# EAGLE board InkTime-PCB (EAGLE 9.7.0)
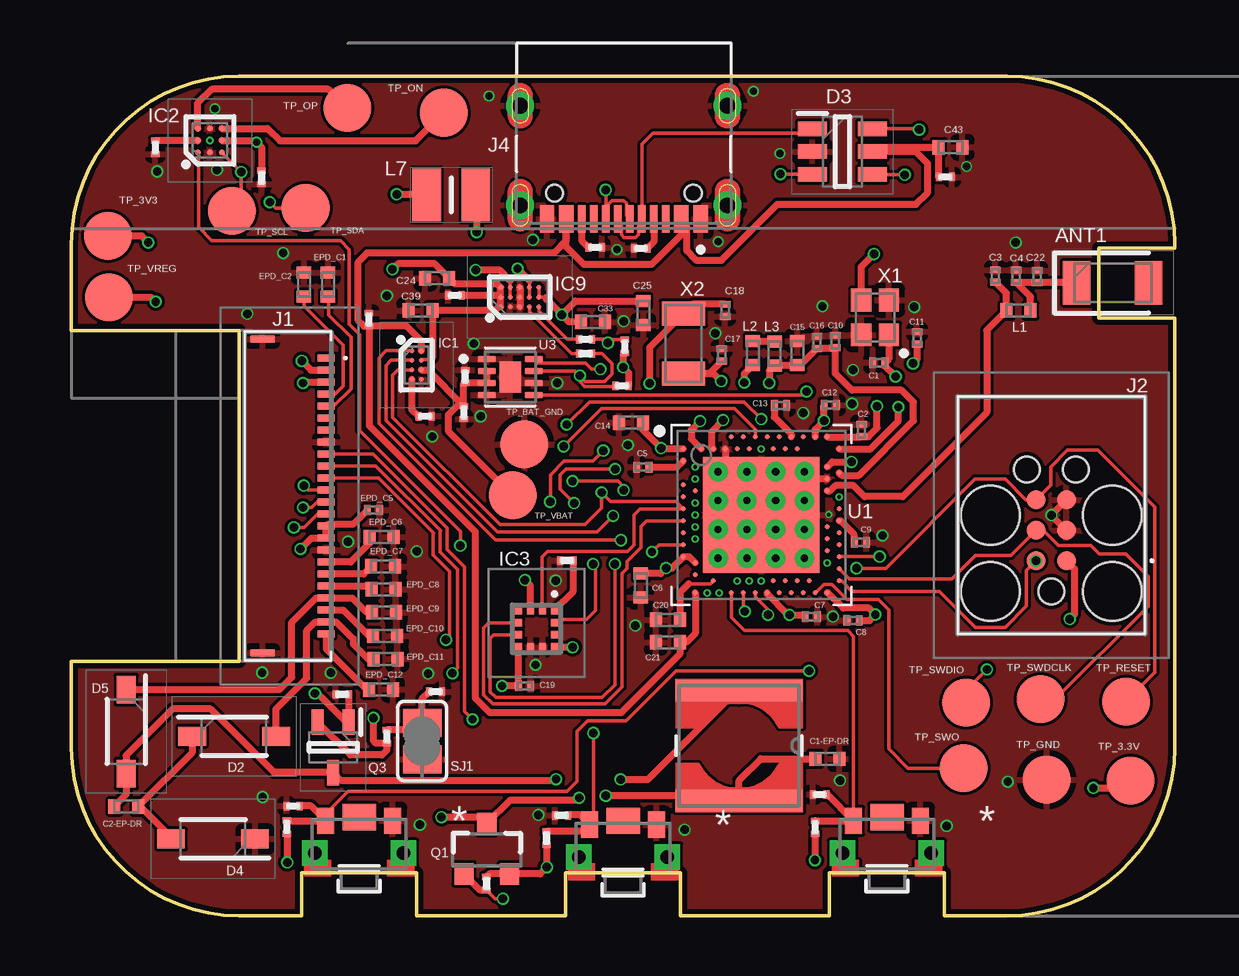
[diagram p0: board, top side]
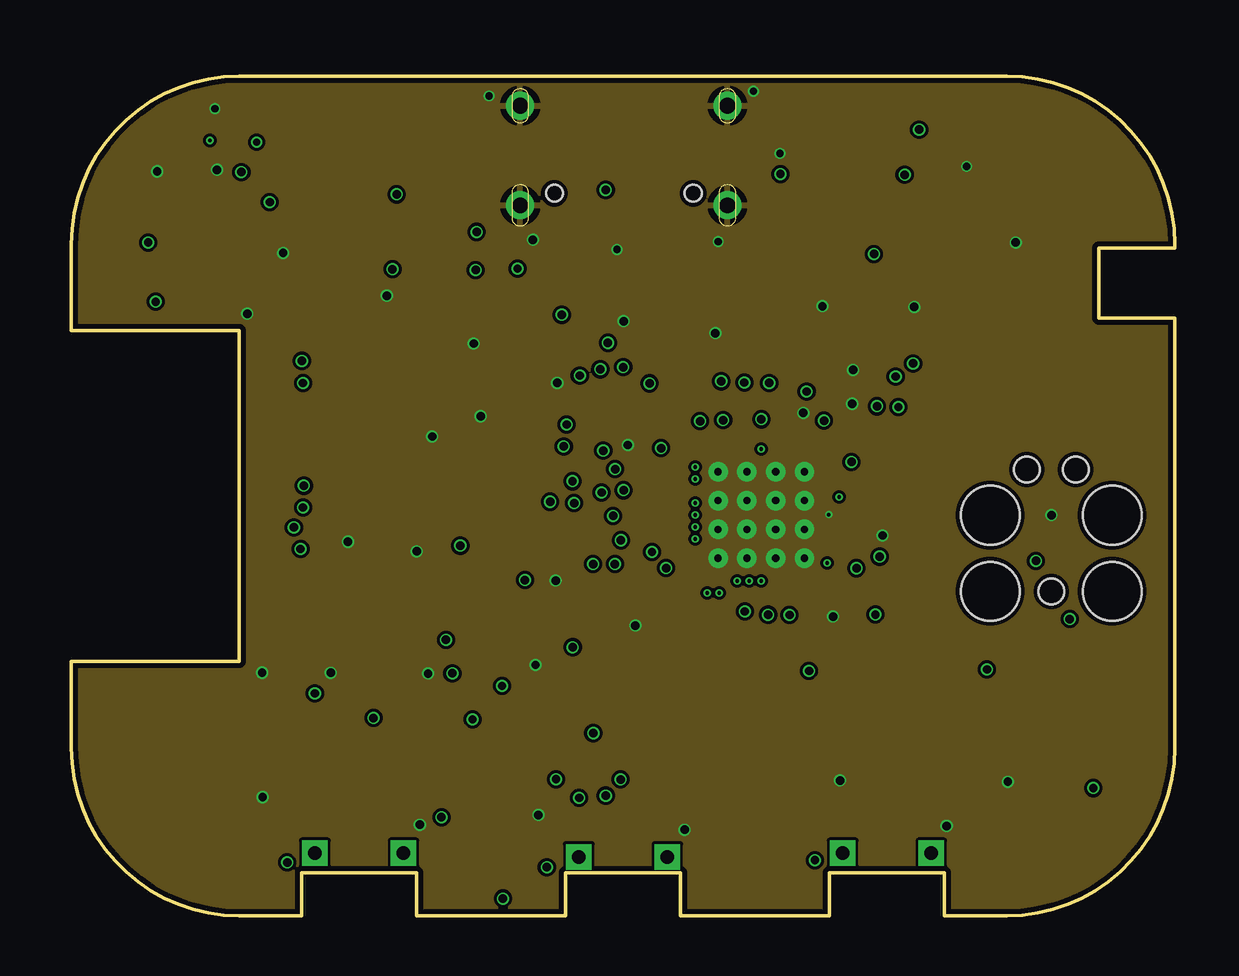
[diagram p1: board, inner layer Route2]
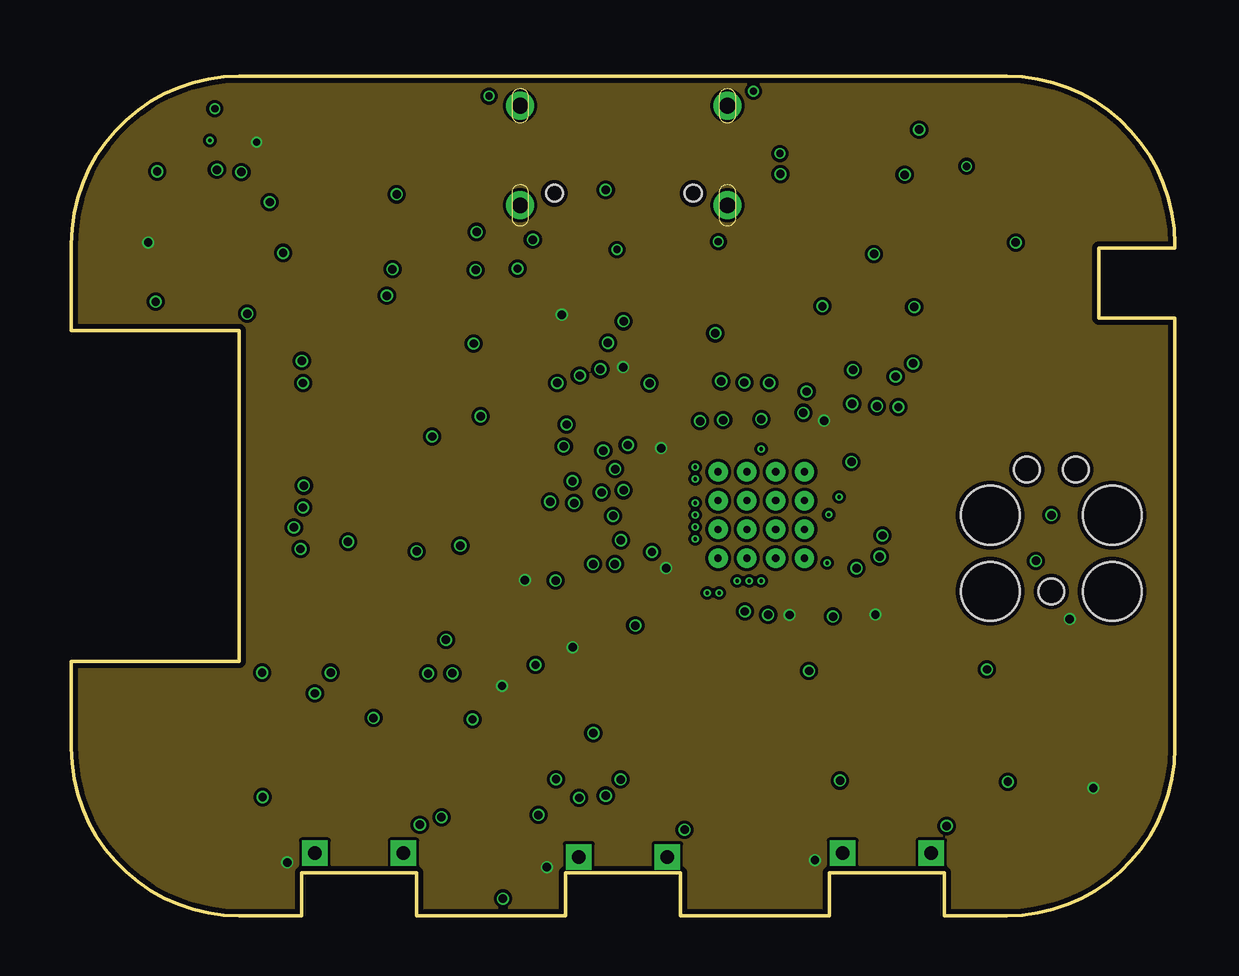
[diagram p2: board, inner layer Route15]
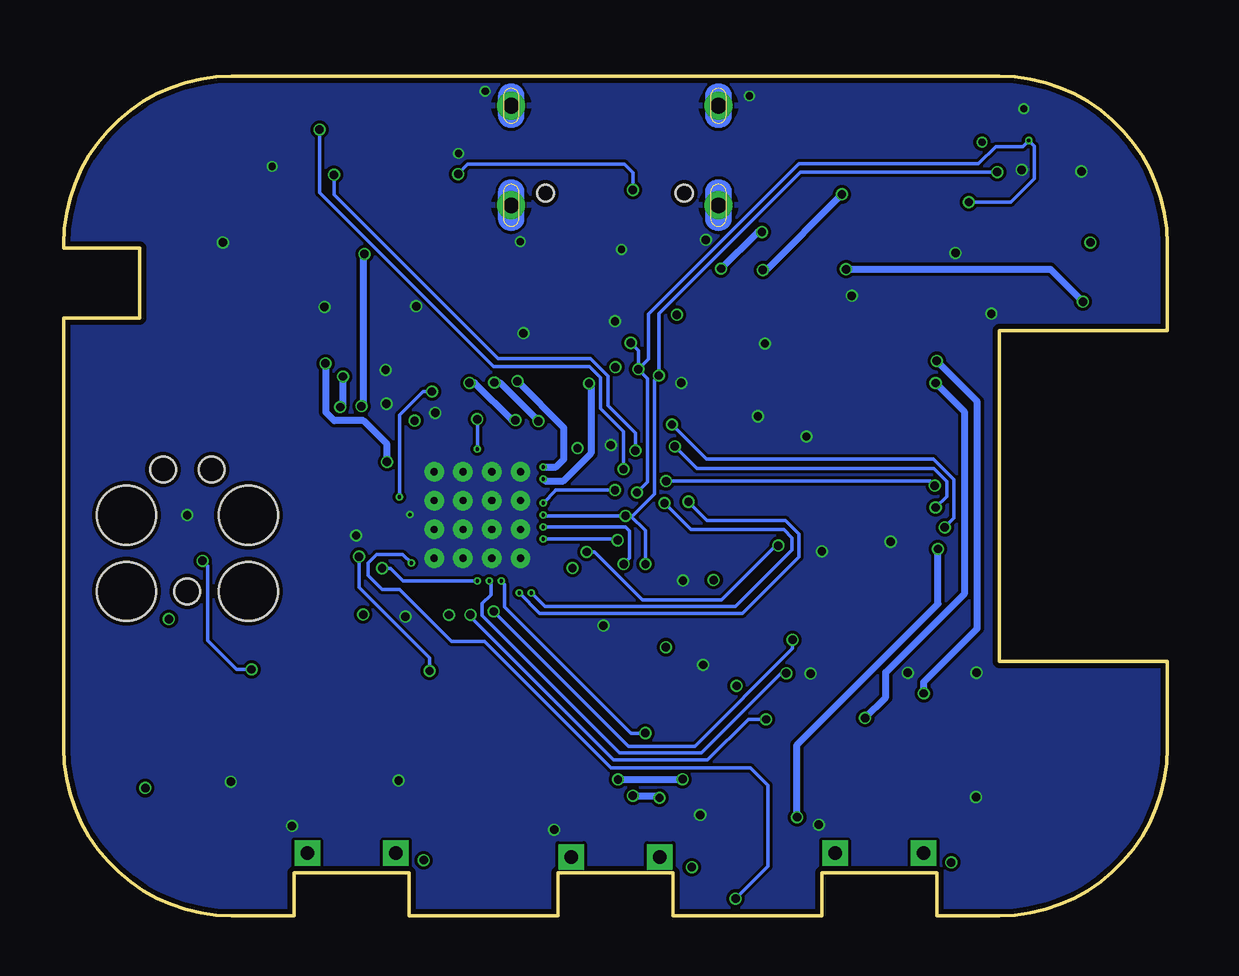
[diagram p3: board, bottom side, seen from below]

Size 46 x 35 mm. Coordinates in mm from the lower left corner, seen from the top.
Outline: 7,0 9.6,0 9.6,1.8 14.4,1.8 14.4,0 20.6,0 20.6,1.8 25.4,1.8 25.4,0 31.6,0 31.6,1.8 36.4,1.8 36.4,0 39,0 arc90 46,7 46,24.93 42.83,24.93 42.83,27.84 46,27.84 46,28 arc90 39,35 7,35 arc90 0,28 0,24.4 7,24.4 7,10.6 0,10.6 0,7 arc90 7,0
Copper layers (1+2*15+16): Top 0.035mm / dielectric 1.6mm / Route2 0.035mm / dielectric 0.15mm / Route15 0.035mm / dielectric 0.2mm / Bottom 0.035mm
Design rules "jlcpcb-2layers.dru *": minimum track width 5mil, minimum drill 0.3mm, track to track 5mil, track to pad 5mil, pad to pad 5mil, via to via 5mil, smd to smd 5mil, copper to edge 0.2mm, drill to drill 6mil, minimum pad ring 10mil, minimum via ring 3mil, stop-mask expansion 4mil, vias tented up to drill 0mil, thermal gap 10mil

## Footprints (pad centres in the part's own frame; a part is rotated, then mirrored left to right if it is on the bottom)
2450AT18B100E_ANTC3216X140N = smd 1.15 x 1.8: 1 -1.5,0; 2 1.5,0
NORDIC_NRF_3_RESC0201_L = smd 0.28 x 0.43: 1 -0.255,0; 2 0.255,0
NORDIC_NRF_3_RESC0402_L = smd 0.5 x 0.6: 1 -0.5,0; 2 0.5,0
GRM011R60J152KE01L_1_0201 = smd 0.35 x 0.25: 1 0,0.275; 2 0,-0.275
ESP32_C6_LIBRARY_5_SOD3716X135N = smd 1.15 x 0.8: 1 -1.75,0; 2 1.75,0
ESP32_C6_LIBRARY_3_SOT95P280X145-6N = smd 1.2 x 0.6: 1 -1.25,0.95; 2 -1.25,0; 3 -1.25,-0.95; 4 1.25,-0.95; 5 1.25,0; 6 1.25,0.95
BQ25180YBGR_BGA8C40P2X4_100X155X50 = smd 0.2 x 0.2: A1 -0.2,0.6; A2 0.2,0.6; B1 -0.2,0.2; B2 0.2,0.2; C1 -0.2,-0.2; C2 0.2,-0.2; D1 -0.2,-0.6; D2 0.2,-0.6
DRV2605YZFR_BGA9C50P3X3_144X144X62 = smd 0.25 x 0.25: A1 -0.5,0.5; A2 0,0.5; A3 0.5,0.5; B1 -0.5,0; B2 0,0; B3 0.5,0; C1 -0.5,-0.5; C2 0,-0.5; C3 0.5,-0.5
BMA423_BMA423 = smd 0.3 x 0.35: 1 -0.75,-0.775; 2 -0.25,-0.775; 3 0.25,-0.775; 4 0.75,-0.775; 7 0.75,0.775; 8 0.25,0.775; 9 -0.25,0.775; 10 -0.75,0.775 | smd 0.35 x 0.3: 5 0.775,-0.25; 6 0.775,0.25; 11 -0.775,0.25; 12 -0.775,-0.25
RT6160AWSC_BGA15C40P3X5_140X230X60 = smd 0.216 x 0.216: A1 -0.4,0.8; A2 0,0.8; A3 0.4,0.8; B1 -0.4,0.4; B2 0,0.4; B3 0.4,0.4; C1 -0.4,0; C2 0,0; C3 0.4,0; D1 -0.4,-0.4; D2 0,-0.4; D3 0.4,-0.4; E1 -0.4,-0.8; E2 0,-0.8; E3 0.4,-0.8
503480-2400_5034802400 = smd 0.3 x 0.7: 1 -5.75,1.525; 2 -5.25,1.525; 3 -4.75,1.525; 4 -4.25,1.525; 5 -3.75,1.525; 6 -3.25,1.525; 7 -2.75,1.525; 8 -2.25,1.525; 9 -1.75,1.525; 10 -1.25,1.525; 11 -0.75,1.525; 12 -0.25,1.525; 13 0.25,1.525; 14 0.75,1.525; 15 1.25,1.525; 16 1.75,1.525; 17 2.25,1.525; 18 2.75,1.525; 19 3.25,1.525; 20 3.75,1.525; 21 4.25,1.525; 22 4.75,1.525; 23 5.25,1.525; 24 5.75,1.525 | smd 0.3 x 1: MP1 -6.54,-1.125; MP2 6.54,-1.125
TC2030-IDC_TC2030IDC = smd 0.783 x 0.783: 1 -0.953,-0.635; 2 -0.953,0.635; 3 0.317,-0.635; 4 0.317,0.635; 5 1.588,-0.635; 6 1.588,0.635 | hole 2.451: -2.223,-2.54; -2.223,2.54; 0.952,-2.54; 0.952,2.54 | hole 1.067: -2.223,0; 2.857,-1.016; 2.857,1.016
KH-TYPE-C-16P_KINGHELM_KH-TYPE-C-16P = smd 0.6 x 1.15: A1_B12 -3.2,4.725; A4_B9 -2.4,4.725; A9_B4 2.4,4.725; A12_B1 3.2,4.725 | smd 0.3 x 1.15: A5 -1.25,4.725; A6 -0.25,4.725; A7 0.25,4.725; A8 1.25,4.725; B5 1.75,4.725; B6 0.75,4.725; B7 -0.75,4.725; B8 -1.75,4.725 | drill 0.65 pad 1.05: SH1 -4.32,0; SH2 4.32,0; SH3 -4.32,4.15; SH4 4.32,4.15 | hole 0.7: -2.89,3.65; 2.89,3.65
NORDIC_NRF_2_RESC0402_L = smd 0.5 x 0.6: 1 -0.5,0; 2 0.5,0
ESP32_C6_LIBRARY_2_IND_4828-WE-TPC_WRE = smd 0.9 x 5.3: 1 -2.286,0; 2 2.286,0
MLP2016SR47MT0S1_INDC2016X100N = smd 1.2 x 2.2: 1 -1.028,0; 2 1.028,0
ESP32_C6_LIBRARY_4_ESP32_C6_LIBRARY_4_ESP32_C6_LIBRARY_4_ESP32_C6_LIBRARY_4_ESP32_WROVER_SPARKFUN-DISCRETESEMI_SOT23-3 = smd 0.8 x 0.9: 1 -0.95,-1; 2 0.95,-1; 3 0,1.1
ESP32_C6_LIBRARY_6_SOT65P210X110-3N = smd 1.05 x 0.5: 1 -1.05,0.65; 2 -1.05,-0.65; 3 1.05,0
CPF0201D7K68C1_0201 = smd 0.35 x 0.25: 1 0,0.275; 2 0,-0.275
ESP32_C6_LIBRARY_7_JUMPER_SJ = smd 1.168 x 1.6: 1 -0.762,0; 2 0.762,0
2025-10-22_07-23-44_LIBRARY_SW_EVP-AKE31A_PAN = smd 0.711 x 1.092: 1 -1.4,-0.972; 2 1.4,-0.972 | drill 0.559 pad 0.914 square: 3 -1.848,0.381; 4 1.848,0.381 | smd 1.397 x 1.092: 5 0,-1.124
HECTOR_WATCH_1_TP20R = smd 2 x 2: TP 0,0
NORDIC_NRF_4_AQFN50P700X700X85_HS-74N = smd 4.85 x 4.85: P$74 0,0 | drill 0.3 pad 0.6: P$75 -1.8,1.8; P$76 -0.6,1.8; P$77 0.6,1.8; P$78 1.8,1.8; P$79 -1.8,0.6; P$80 -0.6,0.6; P$81 0.6,0.6; P$82 1.8,0.6; P$83 -1.8,-0.6; P$84 -0.6,-0.6; P$85 0.6,-0.6; P$86 1.8,-0.6; P$87 -1.8,-1.8; P$88 -0.6,-1.8; P$89 0.6,-1.8; P$90 1.8,-1.8 | smd 0.2 x 0.2: P$A8 -1.25,3.25; P$A10 -0.75,3.25; P$A12 -0.25,3.25; P$A14 0.25,3.25; P$A16 0.75,3.25; P$A18 1.25,3.25; P$A20 1.75,3.25; P$A22 2.25,3.25; P$A23 2.75,3.25; P$AA24 3.25,-2.25; P$AB2 -2.75,-2.5; P$AC5 -2,-2.75; P$AC9 -1,-2.75; P$AC11 -0.5,-2.75; P$AC13 0,-2.75; P$AC15 0.5,-2.75; P$AC17 1,-2.75; P$AC19 1.5,-2.75; P$AC21 2,-2.75; P$AC24 3.25,-2.75; P$AD2 -2.75,-3.25; P$AD4 -2.25,-3.25; P$AD6 -1.75,-3.25; P$AD8 -1.25,-3.25; P$AD10 -0.75,-3.25; P$AD12 -0.25,-3.25; P$AD14 0.25,-3.25; P$AD16 0.75,-3.25; P$AD18 1.25,-3.25; P$AD20 1.75,-3.25; P$AD22 2.25,-3.25; P$AD23 2.75,-3.25; P$B1 -3.25,2.75; P$B3 -2.5,2.75; P$B5 -2,2.75; P$B7 -1.5,2.75; P$B9 -1,2.75; P$B11 -0.5,2.75; P$B13 0,2.75; P$B15 0.5,2.75; P$B17 1,2.75; P$B19 1.5,2.75; P$B24 3.25,2.75; P$C1 -3.25,2.25; P$D2 -2.75,2; P$D23 2.75,2; P$E24 3.25,1.75; P$F2 -2.75,1.5; P$F23 2.75,1.5; P$G1 -3.25,1.25; P$H2 -2.75,1; P$H23 2.75,1; P$J1 -3.25,0.75; P$J24 3.25,0.75; P$K2 -2.75,0.5; P$L1 -3.25,0.25; P$L24 3.25,0.25; P$M2 -2.75,0; P$N1 -3.25,-0.25; P$N24 3.25,-0.25; P$P2 -2.75,-0.5; P$P23 2.75,-0.5; P$R1 -3.25,-0.75; P$R24 3.25,-0.75; P$T2 -2.75,-1; P$T23 2.75,-1; P$U1 -3.25,-1.25; P$U24 3.25,-1.25; P$V23 2.75,-1.5; P$W1 -3.25,-1.75; P$W24 3.25,-1.75; P$Y2 -2.75,-2; P$Y23 2.75,-2
ESP32_C6_LIBRARY_SON50P200X200X80-9N = smd 0.76 x 0.27: 1 -0.985,0.75; 2 -0.985,0.25; 3 -0.985,-0.25; 4 -0.985,-0.75; 5 0.985,-0.75; 6 0.985,-0.25; 7 0.985,0.25; 8 0.985,0.75 | smd 0.9 x 1.3: 9 0,0
NORDIC_NRF_BT-XTAL_2016_N = smd 0.95 x 0.85: 1 -0.725,-0.575; 2 0.725,-0.575; 3 0.725,0.575; 4 -0.725,0.575
NORDIC_NRF_1_XTAL_3215_N = smd 1 x 1.8: 1 -1.25,0; 2 1.25,0

## Placement (x,y rotation side)
ANT1  2450AT18B100E  [2450AT18B100E_ANTC3216X140N]  43.41,26.39 0 top
C1  12pF  [NORDIC_NRF_3_RESC0201_L]  33.66,23.05 180 top
C1-EP-DR  10uF  [NORDIC_NRF_3_RESC0402_L]  31.51,6.54 0 top
C2  12pF  [NORDIC_NRF_3_RESC0201_L]  32.94,20.23 90 top
C2-EP-DR  4.7uF/25V  [NORDIC_NRF_3_RESC0402_L]  2.29,4.55 180 top
C3  1pF  [NORDIC_NRF_3_RESC0201_L]  38.52,26.67 90 top
C4  1pF  [NORDIC_NRF_3_RESC0201_L]  39.38,26.66 90 top
C5  100nF  [NORDIC_NRF_3_RESC0201_L]  23.83,18.7 0 top
C6  4.7µF  [NORDIC_NRF_3_RESC0402_L]  23.74,13.76 90 top
C7  100nF  [NORDIC_NRF_3_RESC0201_L]  30.85,12.47 0 top
C8  100nF  [NORDIC_NRF_3_RESC0201_L]  32.58,12.31 180 top
C9  820pF  [NORDIC_NRF_3_RESC0201_L]  32.89,15.57 0 top
C10  N.C.  [NORDIC_NRF_3_RESC0201_L]  31.84,23.94 90 top
C11  100pF  [NORDIC_NRF_3_RESC0201_L]  35.26,24.09 90 top
C12  100nF  [NORDIC_NRF_3_RESC0201_L]  31.64,21.29 0 top
C13  N.C.  [NORDIC_NRF_3_RESC0201_L]  29.56,21.28 0 top
C14  4.7µF  [NORDIC_NRF_3_RESC0402_L]  23.32,20.55 0 top
C15  1.0µF  [NORDIC_NRF_3_RESC0402_L]  30.26,23.46 90 top
C16  47nF  [NORDIC_NRF_3_RESC0201_L]  31.08,23.91 90 top
C17  12pF  [NORDIC_NRF_3_RESC0201_L]  27.11,23.38 270 top
C18  12pF  [NORDIC_NRF_3_RESC0201_L]  27.26,25.24 90 top
C19  100nF  [NORDIC_NRF_3_RESC0201_L]  18.9,9.59 0 top
C20  4.7µF  [NORDIC_NRF_3_RESC0402_L]  24.88,12.34 0 top
C21  4.7µF  [NORDIC_NRF_3_RESC0402_L]  24.87,11.4 180 top
C22  N.C.  [NORDIC_NRF_3_RESC0201_L]  40.26,26.65 90 top
C23  0.1uF  [GRM011R60J152KE01L_1_0201]  15.98,25.86 90 top
C24  10uF  [NORDIC_NRF_3_RESC0402_L]  15.25,26.58 0 top
C25  22uF  [NORDIC_NRF_3_RESC0402_L]  23.84,25.13 270 top
C27  0.1uF  [GRM011R60J152KE01L_1_0201]  16.42,22.48 0 top
C29  1uF  [GRM011R60J152KE01L_1_0201]  9.25,4.57 90 top
C30  1uF  [GRM011R60J152KE01L_1_0201]  31.19,5.05 90 top
C31  1uF  [GRM011R60J152KE01L_1_0201]  20.44,4.19 90 top
C32  1uF  [GRM011R60J152KE01L_1_0201]  3.5,32.03 180 top
C33  22uF  [NORDIC_NRF_3_RESC0402_L]  21.75,24.76 0 top
C34  0.1uF  [GRM011R60J152KE01L_1_0201]  7.93,30.78 180 top
C37  1uF  [GRM011R60J152KE01L_1_0201]  16.36,20.99 180 top
C38  1uF  [GRM011R60J152KE01L_1_0201]  12.41,24.85 0 top
C39  10uF  [NORDIC_NRF_3_RESC0402_L]  14.55,25.23 180 top
C42  0.1uF  [GRM011R60J152KE01L_1_0201]  36.43,30.8 90 top
C43  4.7uF  [NORDIC_NRF_3_RESC0402_L]  36.65,32.04 0 top
D2  MBR0530  [ESP32_C6_LIBRARY_5_SOD3716X135N]  6.79,7.48 0 top
D3  USBLC6-2SC6Y  [ESP32_C6_LIBRARY_3_SOT95P280X145-6N]  32.14,31.86 0 top
D4  MBR0530  [ESP32_C6_LIBRARY_5_SOD3716X135N]  5.91,3.2 180 top
D5  MBR0530  [ESP32_C6_LIBRARY_5_SOD3716X135N]  2.29,7.68 270 top
EPD_C1  1uF/50V  [NORDIC_NRF_3_RESC0402_L]  10.69,26.31 270 top
EPD_C2  1uF/50V  [NORDIC_NRF_3_RESC0402_L]  9.7,26.31 270 top
EPD_C5  0.1uF/50V  [NORDIC_NRF_3_RESC0201_L]  12.6,16.91 180 top
EPD_C6  1uF/50V  [NORDIC_NRF_3_RESC0402_L]  12.94,15.79 180 top
EPD_C7  1uF/50V  [NORDIC_NRF_3_RESC0402_L]  13.01,14.57 180 top
EPD_C8  1uF/50V  [NORDIC_NRF_3_RESC0402_L]  13.02,13.61 180 top
EPD_C9  1uF/50V  [NORDIC_NRF_3_RESC0402_L]  13.04,12.65 180 top
EPD_C10  1uF/50V  [NORDIC_NRF_3_RESC0402_L]  13.07,11.67 180 top
EPD_C11  1uF/50V  [NORDIC_NRF_3_RESC0402_L]  13.09,10.71 180 top
EPD_C12  1uF/50V  [NORDIC_NRF_3_RESC0402_L]  12.91,9.43 180 top
IC1  BQ25180YBGR  [BQ25180YBGR_BGA8C40P2X4_100X155X50]  14.39,22.96 0 top
IC2  DRV2605YZFR  [DRV2605YZFR_BGA9C50P3X3_144X144X62]  5.78,32.32 90 top
IC3  BMA421  [BMA423_BMA423]  19.39,11.97 180 top
IC9  RT6160AWSC  [RT6160AWSC_BGA15C40P3X5_140X230X60]  18.7,25.79 90 top
J1  503480-2400  [503480-2400_5034802400]  9.1,17.5 270 top
J2  TC2030-IDC  [TC2030-IDC_TC2030IDC]  40.85,15.75 90 top
J4  KH-TYPE-C-16P  [KH-TYPE-C-16P_KINGHELM_KH-TYPE-C-16P]  23.03,33.77 180 top
L1  3.9nH  [NORDIC_NRF_2_RESC0402_L]  39.48,25.23 0 top
L2  10µH  [NORDIC_NRF_2_RESC0402_L]  28.41,23.46 90 top
L3  15nH  [NORDIC_NRF_2_RESC0402_L]  29.32,23.45 270 top
L5  68uH  [ESP32_C6_LIBRARY_2_IND_4828-WE-TPC_WRE]  27.83,7.09 270 top
L7  FTC252012SR47MBCA  [MLP2016SR47MT0S1_INDC2016X100N]  15.84,30.05 0 top
Q1  20V/4.2A/52mΩ/1.4W  [ESP32_C6_LIBRARY_4_ESP32_C6_LIBRARY_4_ESP32_C6_LIBRARY_4_ESP32_C6_LIBRARY_4_ESP32_WROVER_SPARKFUN-DISCRETESEMI_SOT23-3]  17.32,2.75 0 top
Q3  SI1308EDL-T1-GE3  [ESP32_C6_LIBRARY_6_SOT65P210X110-3N]  10.91,7.02 270 top
R1  10k  [CPF0201D7K68C1_0201]  31.01,3.68 0 top
R1_EP_DR  0.47  [CPF0201D7K68C1_0201]  13.15,7.47 0 top
R1_USB  5K1  [CPF0201D7K68C1_0201]  23.73,27.82 90 top
R2  0  [CPF0201D7K68C1_0201]  21.44,24.04 270 top
R2_EP_DR  10K  [CPF0201D7K68C1_0201]  11.29,9.23 90 top
R2_USB  5K1  [CPF0201D7K68C1_0201]  21.84,27.86 90 top
R3  0  [CPF0201D7K68C1_0201]  20.66,14.81 90 top
R4  0  [CPF0201D7K68C1_0201]  21.43,23.44 270 top
R7  10k  [CPF0201D7K68C1_0201]  8.99,3.7 0 top
R8  10k  [CPF0201D7K68C1_0201]  19.81,3.24 0 top
R9  10K  [CPF0201D7K68C1_0201]  14.74,20.82 270 top
R17  3K3  [CPF0201D7K68C1_0201]  22.96,22.1 270 top
R18  3K3  [CPF0201D7K68C1_0201]  23.06,23.74 180 top
R_PWR_EPD  10K  [CPF0201D7K68C1_0201]  17.31,1.35 180 top
R_TYPE_SEL  2.2  [CPF0201D7K68C1_0201]  15.18,9.34 270 top
SJ1  [ESP32_C6_LIBRARY_7_JUMPER_SJ]  14.62,7.29 90 top
SW_DN  2025-10-22_07-23-44_LIBRARY_EVP-AKE31ASW_EVP-AKE31A_PAN  [2025-10-22_07-23-44_LIBRARY_SW_EVP-AKE31A_PAN]  12,2.99 180 top
SW_ENT  2025-10-22_07-23-44_LIBRARY_EVP-AKE31ASW_EVP-AKE31A_PAN  [2025-10-22_07-23-44_LIBRARY_SW_EVP-AKE31A_PAN]  23,2.83 180 top
SW_UP  2025-10-22_07-23-44_LIBRARY_EVP-AKE31ASW_EVP-AKE31A_PAN  [2025-10-22_07-23-44_LIBRARY_SW_EVP-AKE31A_PAN]  34,2.99 180 top
TP_3.3V  HECTOR_WATCH_1_TPTP20R  [HECTOR_WATCH_1_TP20R]  44.16,5.63 0 top
TP_3V3  HECTOR_WATCH_1_TPTP20R  [HECTOR_WATCH_1_TP20R]  1.53,28.34 0 top
TP_BAT_GND  HECTOR_WATCH_1_TPTP20R  [HECTOR_WATCH_1_TP20R]  18.88,19.65 0 top
TP_GND  HECTOR_WATCH_1_TPTP20R  [HECTOR_WATCH_1_TP20R]  40.66,5.67 0 top
TP_ON  HECTOR_WATCH_1_TPTP20R  [HECTOR_WATCH_1_TP20R]  15.53,33.48 0 top
TP_OP  HECTOR_WATCH_1_TPTP20R  [HECTOR_WATCH_1_TP20R]  11.5,33.68 0 top
TP_RESET  HECTOR_WATCH_1_TPTP20R  [HECTOR_WATCH_1_TP20R]  43.96,8.93 0 top
TP_SCL  HECTOR_WATCH_1_TPTP20R  [HECTOR_WATCH_1_TP20R]  6.7,29.39 0 top
TP_SDA  HECTOR_WATCH_1_TPTP20R  [HECTOR_WATCH_1_TP20R]  9.77,29.51 0 top
TP_SWDCLK  HECTOR_WATCH_1_TPTP20R  [HECTOR_WATCH_1_TP20R]  40.4,9.02 0 top
TP_SWDIO  HECTOR_WATCH_1_TPTP20R  [HECTOR_WATCH_1_TP20R]  37.29,8.89 0 top
TP_SWO  HECTOR_WATCH_1_TPTP20R  [HECTOR_WATCH_1_TP20R]  37.2,6.16 0 top
TP_VBAT  HECTOR_WATCH_1_TPTP20R  [HECTOR_WATCH_1_TP20R]  18.4,17.53 0 top
TP_VREG  HECTOR_WATCH_1_TPTP20R  [HECTOR_WATCH_1_TP20R]  1.57,25.79 0 top
U1  NRF52840_QF  [NORDIC_NRF_4_AQFN50P700X700X85_HS-74N]  28.76,16.71 0 top
U3  MAX17048G+T10  [ESP32_C6_LIBRARY_SON50P200X200X80-9N]  18.3,22.46 0 top
X1  32MHz  [NORDIC_NRF_BT-XTAL_2016_N]  33.5,24.94 90 top
X2  32.768kHz  [NORDIC_NRF_1_XTAL_3215_N]  25.52,23.86 90 top

## Library data of the parts
ANT1 = Library_Project; ARROW_PART_NUMBER: 2450AT18B100E; ARROW_PRICE-STOCK: https://www.arrow.com/en/products/2450at18b100e/johanson-dielectrics?utm_currency=USD&region=nac; DESCRIPTION: Antennas 2.45GHz ANTENNA; HEIGHT: 1.4mm; MANUFACTURER_NAME: JOHANSON TECHNOLOGY; MANUFACTURER_PART_NUMBER: 2450AT18B100E; MOUSER_PART_NUMBER: 609-2450AT18B100E; MOUSER_PRICE-STOCK: https://www.mouser.co.uk/ProductDetail/Johanson-Technology/2450AT18B100E?qs=yCnrNFeXz%252Bh5MFsFIXGZGA%3D%3D
C1 C1-EP-DR C2 C2-EP-DR C3-C25 C27 C29-C34 C37-C39 C42 C43 EPD_C1 EPD_C2 EPD_C5-EPD_C12 L1-L3 R1 R1_EP_DR R1_USB R2 R2_EP_DR R2_USB R3 R4 R7-R9 R17 R18 R_PWR_EPD R_TYPE_SEL SJ1 TP_3.3V TP_3V3 TP_BAT_GND TP_GND TP_ON TP_OP TP_RESET TP_SCL TP_SDA TP_SWDCLK TP_SWDIO TP_SWO TP_VBAT TP_VREG U1 X1 X2 = Library_Project
D2 D4 D5 = Library_Project; AVAILABILITY: In Stock; CHECK_PRICES: https://www.snapeda.com/parts/MBR0530/Onsemi/view-part/?ref=eda; DESCRIPTION: Diode Schottky 30 V 500mA Surface Mount SOD-123; MF: ON Semiconductor; MP: MBR0530; PACKAGE: SOD-123-2 ON Semiconductor; PRICE: None; PURCHASE-URL: https://www.snapeda.com/api/url_track_click_mouser/?unipart_id=179458&manufacturer=ON Semiconductor&part_name=MBR0530&search_term=None; SNAPEDA_LINK: https://www.snapeda.com/parts/MBR0530/Onsemi/view-part/?ref=snap
D3 = Library_Project; AVAILABILITY: In Stock; CHECK_PRICES: https://www.snapeda.com/parts/USBLC6-2SC6Y/STMicroelectronics/view-part/?ref=eda; DESCRIPTION: 17V Clamp 5A (8/20µs) Ipp Tvs Diode Surface Mount SOT-23-6; MF: STMicroelectronics; MP: USBLC6-2SC6Y; PACKAGE: SOT-23-6 STMicroelectronics; PRICE: None; SNAPEDA_LINK: https://www.snapeda.com/parts/USBLC6-2SC6Y/STMicroelectronics/view-part/?ref=snap
IC1 = Library_Project; ARROW_PART_NUMBER: BQ25180YBGR; ARROW_PRICE-STOCK: https://www.arrow.com/en/products/bq25180ybgr/texas-instruments?utm_currency=USD&region=nac; DESCRIPTION: Charger IC Lithium Ion/Polymer, Lithium Iron Phosphate 8-DSBGA (1.6x1.1); HEIGHT: 0.5mm; MANUFACTURER_NAME: Texas Instruments; MANUFACTURER_PART_NUMBER: BQ25180YBGR; MOUSER_PART_NUMBER: 595-BQ25180YBGR; MOUSER_PRICE-STOCK: https://www.mouser.co.uk/ProductDetail/Texas-Instruments/BQ25180YBGR?qs=doiCPypUmgEWjAK%252BJAX6Tw%3D%3D
IC2 = Library_Project; ARROW_PART_NUMBER: DRV2605YZFR; ARROW_PRICE-STOCK: https://www.arrow.com/en/products/drv2605yzfr/texas-instruments?region=nac; DESCRIPTION: Haptic Driver for ERM/LRA with Built-In Library and Smart Loop Architecture; HEIGHT: 0.625mm; MANUFACTURER_NAME: Texas Instruments; MANUFACTURER_PART_NUMBER: DRV2605YZFR
IC3 = Library_Project; ARROW_PART_NUMBER: BMA423; ARROW_PRICE-STOCK: https://www.arrow.com/en/products/bma423/bosch; DESCRIPTION: Accelerometers Triaxial low-g 12bit Acceleration Sensor; HEIGHT: 1mm; MANUFACTURER_NAME: BOSCH; MANUFACTURER_PART_NUMBER: BMA423; MOUSER_PART_NUMBER: 262-BMA423; MOUSER_PRICE-STOCK: https://www.mouser.co.uk/ProductDetail/Bosch-Sensortec/BMA423?qs=HXFqYaX1Q2xC%252BSgeGoX3mg%3D%3D
IC9 = Library_Project; DESCRIPTION: Buck-Boost Regulator Positive Output Step-Up/Step-Down I2C DC-DC Controller IC 15-WL-CSP (BSC) (1.4x2.3); HEIGHT: 0.6mm; MANUFACTURER_NAME: RICHTEK; MANUFACTURER_PART_NUMBER: RT6160AWSC; MOUSER_PART_NUMBER: 835-RT6160AWSC; MOUSER_PRICE-STOCK: https://www.mouser.co.uk/ProductDetail/Richtek/RT6160AWSC?qs=amGC7iS6iy%2FLd9PSoixZXQ%3D%3D
J1 = Library_Project; DESCRIPTION: FFC & FPC Connectors 0.5mm FPC RA SMT Dual Contact 24Ckt; HEIGHT: 1.87mm; MANUFACTURER_NAME: Molex; MANUFACTURER_PART_NUMBER: 503480-2400; MOUSER_PART_NUMBER: 538-503480-2400; MOUSER_PRICE-STOCK: https://www.mouser.co.uk/ProductDetail/Molex/503480-2400?qs=OAhjpuo3Vu7efIoxFh9AOw%3D%3D
J2 = Library_Project; DESCRIPTION: CABLE ADAPTER 6 POS; HEIGHT: 19mm; MANUFACTURER_NAME: Tag Connect; MANUFACTURER_PART_NUMBER: TC2030-IDC
J4 = Library_Project; AVAILABILITY: Not in stock; CHECK_PRICES: https://www.snapeda.com/parts/KH-TYPE-C-16P/Kinghelm/view-part/?ref=eda; MF: kinghelm; MP: KH-TYPE-C-16P; PACKAGE: None; PRICE: None; SNAPEDA_LINK: https://www.snapeda.com/parts/KH-TYPE-C-16P/Kinghelm/view-part/?ref=snap
L5 = Library_Project; COPYRIGHT: Copyright (C) 2024 Ultra Librarian. All rights reserved.; MANUFACTURER_PART_NUMBER: 744043680; MFR_NAME: Wurth Electronics
L7 = Library_Project; DESCRIPTION: SMD / SMT Inductors (Coils), L=0.47?H, L x W x T :; HEIGHT: 1mm; JLCPCB: https://jlcpcb.com/partdetail/6763488-FTC252012SR47MBCA/C5832368; MANUFACTURER_NAME: TDK; MANUFACTURER_PART_NUMBER: FTC252012SR47MBCA
Q1 = Library_Project; PROD_ID: TRAN-14388
Q3 = Library_Project; AVAILABILITY: In Stock; CHECK_PRICES: https://www.snapeda.com/parts/SI1308EDL-T1-GE3/Vishay+Siliconix/view-part/?ref=eda; DESCRIPTION: Si1308EDL-T1-GE3 N-channel MOSFET Transistor, 1.5 A, 30 V, 3-Pin SC-70 | Siliconix / Vishay SI1308EDL-T1-GE3; MF: Vishay Siliconix; MP: SI1308EDL-T1-GE3; PACKAGE: SOT-323 Vishay Semiconductor; PRICE: None; PURCHASE-URL: https://www.snapeda.com/api/url_track_click_mouser/?unipart_id=274603&manufacturer=Vishay Siliconix&part_name=SI1308EDL-T1-GE3&search_term=None; SNAPEDA_LINK: https://www.snapeda.com/parts/SI1308EDL-T1-GE3/Vishay+Siliconix/view-part/?ref=snap
SW_DN SW_ENT SW_UP = Library_Project; COPYRIGHT: Copyright (C) 2025 Ultra Librarian. All rights reserved.; DIGI-KEY_PART_NUMBER_1: P123437TR-ND; DIGI-KEY_PART_NUMBER_2: P123437CT-ND; DIGI-KEY_PART_NUMBER_3: P123437DKR-ND; MANUFACTURER_NAME: Panasonic; MANUFACTURER_PART_NUMBER: EVP-AKE31A
U3 = Library_Project; AVAILABILITY: In Stock; CHECK_PRICES: https://www.snapeda.com/parts/MAX17048G+T10/Analog+Devices/view-part/?ref=eda; DESCRIPTION: 3µA 1-Cell/2-Cell Fuel Gauge with ModelGauge; MF: Analog Devices; MP: MAX17048G+T10; PACKAGE: TDFN-8 Maxim; PRICE: None; PURCHASE-URL: https://www.snapeda.com/api/url_track_click_mouser/?unipart_id=329239&manufacturer=Analog Devices&part_name=MAX17048G+T10&search_term=None; SNAPEDA_LINK: https://www.snapeda.com/parts/MAX17048G+T10/Analog+Devices/view-part/?ref=snap

## Nets
3V3: C6.2 C7.1 C8.1 C12.1 C14.2 C19.1 C25.1 C33.1 C34.2 IC2.C2 IC3.3 IC3.7 IC3.10 IC9.E2 IC9.E3 J2.1 Q1.2 R1.2 R7.2 R8.2 R17.1 R18.1 R_PWR_EPD.2 TP_3.3V.TP TP_3V3.TP U1.P$A22 U1.P$AD14 U1.P$AD23 U1.P$B1 U1.P$W1 U1.P$Y2
ALERT: U1.P$J24 U3.5
D+: D3.4 U1.P$AD6
D-: D3.6 U1.P$AD4
DN: D3.1 J4.A7 J4.B7
DP: D3.3 J4.A6 J4.B6
EPD_3V3: C1-EP-DR.1 EPD_C5.2 J1.15 J1.16 L5.2 Q1.3
EPD_BUSY: J1.9 U1.P$AD12
EPD_CS: J1.12 U1.P$K2
EPD_DC: J1.11 U1.P$AD10
EPD_RST: J1.10 U1.P$AC11
GDR: J1.2 Q3.1 R2_EP_DR.2
GND: C1-EP-DR.2 C1.2 C2.2 C3.2 C4.2 C5.1 C6.1 C7.2 C8.2 C9.2 C10.2 C11.2 C12.2 C13.2 C14.1 C15.2 C16.2 C17.1 C18.1 C19.2 C20.1 C21.2 C22.2 C23.1 C24.1 C25.2 C27.1 C29.1 C30.1 C31.1 C32.1 C33.2 C34.1 C37.1 C38.1 C39.2 C42.2 C43.2 D3.2 D4.1 EPD_C1.1 EPD_C2.1 EPD_C5.1 EPD_C6.1 EPD_C7.1 EPD_C8.1 EPD_C9.1 EPD_C10.1 EPD_C11.1 EPD_C12.1 IC1.D2 IC2.B1 IC2.B3 IC3.8 IC3.9 IC9.B1 IC9.C1 IC9.C2 IC9.C3 J1.8 J1.17 J1.MP1 J1.MP2 J2.3 J2.5 J4.A1_B12 J4.A12_B1 J4.SH1 J4.SH2 J4.SH3 J4.SH4 R1_USB.1 R2_EP_DR.1 R2_USB.2 R3.1 R9.1 R_TYPE_SEL.1 SJ1.1 SW_DN.1 SW_ENT.1 SW_UP.1 TP_BAT_GND.TP TP_GND.TP U1.P$74 U1.P$75 U1.P$76 U1.P$77 U1.P$78 U1.P$79 U1.P$80 U1.P$81 U1.P$82 U1.P$83 U1.P$84 U1.P$85 U1.P$86 U1.P$87 U1.P$88 U1.P$89 U1.P$90 U1.P$B7 U1.P$F23 U3.1 U3.4 U3.6 U3.9 X1.2 X1.4
HAPTIC_EN: IC2.A1 U1.P$U1
IMU_INT1: IC3.5 U1.P$N1
IMU_INT2: IC3.6 U1.P$P2
LX1: IC9.B2 IC9.B3 L7.1
LX2: IC9.D2 IC9.D3 L7.2
MOSI: J1.14 U1.P$B13
N$1: IC1.D1 R9.2
N$2: C2-EP-DR.2 D5.2 L5.1 Q3.3
N$3: L2.1 U1.P$B3
N$4: C2-EP-DR.1 D2.1 D4.2
N$6: IC9.D1 R4.2
N$7: R1_EP_DR.1 R_TYPE_SEL.2 SJ1.2
N$8: IC9.E1 R2.2
N$9: J4.B5 R2_USB.1
N$10: IC3.1 R3.2
N$11: C32.2 IC2.A2
N$12: EPD_C2.2 J1.4
N$13: EPD_C1.2 J1.5
N$14: EPD_C6.2 J1.18
N$15: J4.A5 R1_USB.2
N$16: EPD_C7.2 J1.19
N$17: EPD_C8.2 J1.20
N$18: C20.2 U1.P$AC5
N$19: L2.2 L3.1
N$20: C13.1 U1.P$A18
N$22: C5.2 U1.P$C1
N$23: C10.1 C15.1 C16.1 L3.2 U1.P$B5 U1.P$E24
N$24: C11.1 U1.P$D23
N$25: C17.2 U1.P$D2 X2.1
N$26: C18.2 U1.P$F2 X2.2
N$27: EPD_C10.2 J1.22
N$30: EPD_C12.2 J1.24
N$34: C9.1 U1.P$N24
N$37: C3.1 L1.1 U1.P$H23
N$38: ANT1.1 C4.1 C22.1 L1.2
N$39: C1.1 U1.P$B24 X1.1
N$40: C2.1 U1.P$A23 X1.3
OUT+: IC2.A3 TP_OP.TP
OUT-: IC2.C3 TP_ON.TP
P0.04: U1.P$J1
P0.09: U1.P$L24
P0.13: C30.2 R1.1 SW_UP.2 U1.P$AD8
P0.14: C31.2 R8.1 SW_ENT.2 U1.P$AC9
P0.19: U1.P$AD16
P0.20: U1.P$AC15
P0.21: U1.P$AC17
P0.22: U1.P$AD18
P0.23: U1.P$AC19
P0.24: U1.P$AD20
P0.25: U1.P$AC21
P0.26: U1.P$G1
P0.27: U1.P$H2
P0.28: U1.P$B11
P0.29: U1.P$A10
P0.30: U1.P$B9
P0.31: U1.P$A8
P1.01: Q1.1 R_PWR_EPD.1 U1.P$Y23
P1.02: C29.2 R7.1 SW_DN.2 U1.P$W24
P1.03: U1.P$V23
P1.04: U1.P$U24
P1.05: U1.P$T23
P1.06: U1.P$R24
P1.07: U1.P$P23
P1.09: U1.P$R1
P1.10: U1.P$A20
P1.11: U1.P$B19
P1.12: U1.P$B17
P1.13: U1.P$A16
P1.14: U1.P$B15
P1.15: U1.P$A14
PMIC_INT: IC1.A1 U1.P$T2
PREVGH: D5.1 EPD_C9.2 J1.21
PREVGL: D2.2 EPD_C11.2 J1.23
RESE: J1.3 Q3.2 R1_EP_DR.2
RESET: J2.6 TP_RESET.TP U1.P$AC13
SCK: J1.13 U1.P$A12
SCL: IC1.B1 IC2.C1 IC3.12 R4.1 R17.2 TP_SCL.TP U1.P$M2 U3.7
SDA: IC1.C1 IC2.B2 IC3.2 R2.1 R18.2 TP_SDA.TP U1.P$L1 U3.8
SWDCLK: J2.4 TP_SWDCLK.TP U1.P$AA24
SWDIO: J2.2 TP_SWDIO.TP U1.P$AC24
SWO: TP_SWO.TP U1.P$AD22
VBAT: C27.2 C37.2 IC1.C2 TP_VBAT.TP U3.2 U3.3
VBUS: C21.1 C38.2 C42.1 C43.1 D3.5 IC1.A2 J4.A4_B9 J4.A9_B4 U1.P$AD2
VREG: C23.2 C24.2 C39.1 IC1.B2 IC9.A1 IC9.A2 IC9.A3 TP_VREG.TP

## Tracks (layer width: path | path; a pad name or v marks a point on that pad's centre or on a via)
3V3  (via drill 0.3, 0.35)
  Top 0.15: IC9.E3 IC9.E2 19.8,25.79
  Top 0.3: J2.1 41.81,14.47 41.81,12.56 v41.62,12.37 | IC3.10 v20.9,11.2 | IC3.7 C19.1 v17.96,9.59 | IC3.3 19.14,13.77 v18.91,14 | R1.2 31,2.33 v30.99,2.31 | R7.2 v8.99,2.24 v9,2.23 | R8.2 19.82,2.95 v19.82,2.02 19.54,1.75 Q1.2 17.43,1.75 R_PWR_EPD.2 | IC2.C2 7.66,32.32 v7.72,32.25 7.93,32.04 C34.2 | C33.1 20.74,24.76 v20.45,25.05 | v20.45,25.05 19.8,25.7 19.8,25.79 | R18.1 23,23.4 v23,22.87 23.23,22.64 R17.1 | v20.45,25.05 21.02,25.63 C25.1 | U1.P$Y2 25.76,14.96 U1.P$W1 25.05,14.5 v24.79,14.5 24.56,14.26 C6.2 | C7.1 30.51,12.54 v29.94,12.54 29.87,12.54 29.87,12.55 29.01,13.41 U1.P$AD14 | U1.P$AD23 31.54,13.46 32.18,12.83 33.25,12.83 v33.52,12.56 33.27,12.31 C8.1 | U1.P$B1 24.62,19.46 v24.58,19.5 23.82,20.26 C14.2 | U1.P$A22 31.01,20.28 v31.38,20.64 C12.1 | v42.6,5.33 43.85,5.33 TP_3.3V.TP | v3.21,28.07 2.94,28.34 TP_3V3.TP
  pour Route15: -2.19,-0.79 48.25,-0.79 48.25,36.95 -2.19,36.95
ALERT  (via drill 0.15, 0.35)
  Top 0.15: v30.65,21.86 30.5,21.71 U3.5
  Bottom 0.15: v30.65,21.86 31.02,21.86 32,20.87 U1.P$J24
  other vias: 32.01,17.46
D+  (via drill 0.15, 0.35)
  Top 0.15: v34.74,30.89 33.41,30.89 D3.4 | v22.17,19.39 21.74,18.96 20.54,18.96 19.97,18.38 v19.97,17.27 v19.96,17.26
  Bottom 0.15: v34.74,30.89 34.74,30.07 27.9,23.23 24.03,23.23 23.31,22.51 23.31,21.27 22.17,20.13 v22.17,19.39 | v19.96,17.26 19.18,16.48 15.91,16.48 15.35,15.92 15.35,14.97 17.71,12.61 26.16,12.61 U1.P$AD6
  other vias: 27.01,13.46
D-  (via drill 0.15, 0.35)
  Top 0.15: v35.34,32.78 35.31,32.81 D3.6 | v22.67,18.62 20.62,18.62 20.37,18.37 20.37,17.8 v20.96,17.2
  Bottom 0.15: v35.34,32.78 35.34,30.15 28.09,22.89 24.09,22.89 23.62,22.43 23.62,21.14 22.67,20.19 v22.67,18.62 | v20.96,17.2 19.86,16.11 15.99,16.11 15.64,15.76 15.64,15.24 18,12.89 25.94,12.89 U1.P$AD4
  other vias: 26.51,13.46
DN
  Top 0.15: D3.1 30.7,32.62 24.24,32.62 23.78,32.16 J4.B7 23.63,28.9 23.63,28.39 23.51,28.27 23.05,28.27 22.93,28.39 22.93,28.9 J4.A7
DP  (via drill 0.35)
  Top 0.15: J4.A6 23.13,29.19 23.13,29.7 23.01,29.82 22.55,29.82 22.28,29.56 J4.B6 v22.28,30.26 | D3.3 v29.56,30.92
  Bottom 0.15: v22.28,30.26 22.28,30.97 22.63,31.32 29.16,31.32 v29.56,30.92
EPD_3V3  (via drill 0.35)
  Top 0.3: EPD_C5.2 11.74,16.31 10.69,16.31 J1.15 J1.16 10.01,15.75 v9.56,15.29 | C1-EP-DR.1 28.74,6.54 27.83,5.64 L5.2 27.64,5.01 v22.28,5.01 | v15.43,4.11 17.06,4.11 Q1.3 18.29,4.82 21.07,4.82 v21.17,4.92
  Bottom 0.3: v15.43,4.11 15.43,7.13 9.56,13.01 v9.56,15.29 | v22.28,5.01 21.26,5.01 v21.17,4.92
EPD_BUSY  (via drill 0.35)
  Top 0.15: U1.P$AD12 28.51,13.3 29.05,12.76 v29.05,12.55 | v16.73,8.19 16.4,8.52 16.4,14.54 15.66,15.27 15.66,16.17 12.58,19.25 J1.9
  Bottom 0.15: v29.05,12.55 29.05,12.45 23.09,6.5 19.16,6.5 17.47,8.19 v16.73,8.19
EPD_CS  (via drill 0.15, 0.35)
  Top 0.15: v20.89,18.12 22.79,18.12 23.02,17.88 v23.02,17.74 | v20.89,18.12 | v9.69,17.93 v9.7,17.93 9.88,17.75 J1.12
  Bottom 0.15: v23.02,17.74 25.5,17.74 25.5,17.73 U1.P$K2 | v20.89,18.12 9.88,18.12 v9.69,17.93
  other vias: 26.01,17.21
EPD_DC  (via drill 0.35)
  Top 0.15: U1.P$AD10 28.01,12.75 v28.08,12.69 | J1.11 10.63,18.24 12.8,18.24 15.1,15.95 15.09,15.94 15.09,15.04 15.77,14.35 15.77,11.66 v15.62,11.51
  Bottom 0.15: v28.08,12.69 22.46,7.07 19.69,7.07 15.62,11.15 v15.62,11.51
EPD_RST  (via drill 0.15, 0.35)
  Top 0.15: v15.88,10.11 16.1,10.33 16.1,14.44 15.38,15.16 15.38,16.05 15.38,16.06 12.69,18.75 J1.10
  Bottom 0.15: v15.88,10.11 16.11,10.11 19.43,6.79 22.83,6.79 28.56,12.53 28.56,13.01 28.19,13.38 28.19,13.89 U1.P$AC11
  other vias: 28.26,13.96
GDR  (via drill 0.35)
  Top 0.3: Q3.1 11.49,8.14 | Q3.1 R2_EP_DR.2 | Q3.1 11.48,8.07 10.27,9.27 v10.15,9.27 | v9.61,23.13 10,22.75 J1.2
  Bottom 0.3: v10.15,9.27 10.15,9.75 7.93,11.97 7.93,21.43 v9.61,23.12 v9.61,23.13
GND  (via drill 0.15, 0.3, 0.35)
  Top 0.3: J2.5 v40.85,16.7 J2.3 | IC9.C3 IC9.C2 IC9.C1 | U1.P$F23 30.86,18.21 U1.P$78 | U1.P$B7 27.26,18.81 U1.P$75
  other vias: 39.37,28.07 20.26,22.21 17.06,20.82 16.77,23.85 19.35,10.46 20.19,13.98 32.04,5.64 36.49,3.74 25.56,3.59 14.53,3.8 7.98,4.95 19.47,4.2 17.42,34.18 28.43,34.37 26.97,28.1 22.75,27.78 29.54,31.78 37.32,31.24 5.98,33.65 3.58,31.03 7.33,25.1 7.95,10.14 6.07,31.1 13.15,25.85 23.02,24.78 26.84,24.28 23.51,12.1 31.75,12.47 33.81,15.86 23.2,19.62 31.31,25.41 32.55,21.34 35.13,25.38 32.59,22.75 30.51,20.97 14.4,15.19 8.83,27.63 14.87,10.1 10.82,10.13 39.04,5.59 11.53,15.59 15.04,19.98 19.24,28.18 31.58,16.73
  pour Top: 0.96,-2.46 41.5,-2.46 46.75,2.79 46.75,33.93 42.8,37.88 -1.19,37.88 -1.19,-0.31
  pour Bottom: -1.19,-1.19 46.1,-1.19 48.45,1.16 48.45,35.6 44.6,39.75 0.56,39.75 -1.19,38
  pour Route2: -0.02,-0.29 45.92,-0.29 45.92,28 45.88,28.78 45.75,29.54 45.54,30.29 45.24,31 44.86,31.68 44.41,32.32 43.9,32.9 43.32,33.41 42.68,33.86 42,34.24 41.29,34.54 40.54,34.75 39.78,34.88 39,34.92 7,34.92 6.21,34.88 5.44,34.75 4.68,34.53 3.95,34.23 3.26,33.85 2.62,33.39 2.03,32.87 1.51,32.28 1.05,31.64 0.67,30.95 0.37,30.22 0.15,29.46 0.02,28.69 -0.02,27.9
HAPTIC_EN  (via drill 0.35)
  Top 0.15: v16.22,15.43 16.22,16.03 12.02,20.22 12.02,24.23 11.59,24.67 11.59,27.78 11.22,28.15 5.86,28.15 5.3,28.71 5.3,31.79 IC2.A1 | U1.P$U1 24.5,15.46 v24.2,15.17
  Bottom 0.15: v16.22,15.43 16.31,15.43 18.57,13.17 21.87,13.17 23.88,15.17 v24.2,15.17
IMU_INT1
  Top 0.15: IC3.5 17.4,12.21 17.19,12 17.19,9.22 17.58,8.82 22.24,8.82 22.95,9.54 22.95,14.27 23.16,14.47 23.16,14.77 23.74,15.35 23.74,16.23 23.97,16.47 U1.P$N1
IMU_INT2  (via drill 0.15, 0.35)
  Top 0.15: IC3.6 17.61,11.71 17.46,11.57 17.46,9.33 17.7,9.1 22.13,9.1 22.66,9.63 v22.66,14.66
  Bottom 0.15: v22.66,14.66 22.41,14.91 22.41,16.05 22.58,16.21 U1.P$P2
  other vias: 26.01,16.21
LX1  (via drill 0.35)
  Top 0.15: 18.3,26.48 IC9.B3 IC9.B2
  Top 0.3: 18.3,26.48 17.87,26.91 v16.87,26.91 v16.86,26.92 | L7.1 13.58,30.05 v13.56,30.07
  Bottom 0.3: v16.86,26.92 16.71,26.92 v13.56,30.07
LX2  (via drill 0.35)
  Top 0.15: IC9.D2 IC9.D3 19.1,26.48
  Top 0.3: 19.1,26.48 v18.6,26.98 | L7.2 16.9,30.02 v16.9,28.51
  Bottom 0.3: v18.6,26.98 18.62,26.96 17.07,28.51 v16.9,28.51
MOSI  (via drill 0.15, 0.35)
  Top 0.15: v20.65,20.48 21.6,21.43 28.04,21.43 v28.77,20.7 | J1.14 10.27,16.75 9.7,16.19 v9.28,16.19
  Bottom 0.15: v20.65,20.48 v20.64,20.48 19.22,19.05 9.75,19.05 8.89,18.19 8.89,16.58 v9.28,16.19 | U1.P$B13 v28.76,20.7 v28.77,20.7
  other vias: 28.76,19.46
N$1
  Top 0.3: IC1.D1 14.19,21.1 R9.2
N$2  (via drill 0.35)
  Top 0.3: C2-EP-DR.2 2.29,5.05 D5.2 2.29,6.69 4.22,8.62 5.81,8.62 8.45,5.97 Q3.3 11.25,5.63 20.14,5.63 v20.21,5.7 | L5.1 27.73,9.38 24.04,5.68 v22.9,5.68
  Bottom 0.3: v22.9,5.68 v20.22,5.68 v20.21,5.7
N$3  (via drill 0.35)
  Top 0.3: U1.P$B3 25.84,19.88 25.84,20.25 v26.21,20.62 | v28.05,22.23 28.05,22.6 L2.1
  Bottom 0.3: v28.05,22.23 27.82,22.23 v26.21,20.62
N$4
  Top 0.3: D2.1 5.04,6.8 C2-EP-DR.1 2.88,4.55 4.16,3.28 D4.2
N$6
  Top 0.15: IC9.D1 19.1,25.19 20.85,23.44 R4.2
N$7
  Top 0.3: R_TYPE_SEL.2 14.62,9.06 SJ1.2 14.32,7.74 R1_EP_DR.1
N$8
  Top 0.15: R2.2 20.67,24.04 19.5,25.21 IC9.E1
N$9
  Top 0.3: J4.B5 21.29,29.03 21.29,28.12 21.51,27.9 21.53,27.9 R2_USB.1
N$10
  Top 0.3: IC3.1 20.93,13.53 R3.2
N$11
  Top 0.3: IC2.A2 5.26,32.31 C32.2
N$12
  Top 0.15: EPD_C2.2 9.7,25.42 11.33,23.79 11.33,22.08 11,21.75 J1.4
N$13
  Top 0.15: EPD_C1.2 10.72,25.78 10.72,25.05 11.65,24.12 11.65,21.96 10.94,21.25 J1.5
N$14
  Top 0.3: J1.18 10.63,14.74 11.64,14.74 12.44,15.54 EPD_C6.2
N$15
  Top 0.3: R1_USB.2 24.28,28.1 J4.A5
N$16
  Top 0.3: EPD_C7.2 12.19,14.25 J1.19
N$17
  Top 0.3: J1.20 12.38,13.75 EPD_C8.2
N$18
  Top 0.15: U1.P$AC5 26.64,13.84 25.73,13.84
  Top 0.3: 25.73,13.84 25.38,13.49 C20.2
N$19
  Top 0.3: L3.1 28.42,23.95 L2.2
N$20
  Top 0.3: C13.1 29.3,20.79 30.01,20.08 U1.P$A18
N$22
  Top 0.3: C5.2 25.25,18.7 U1.P$C1
N$23  (via drill 0.35)
  Top 0.3: v29.09,22.21 29.09,22.72 L3.2 30.25,22.95 C15.1 30.39,22.96 C16.1 31.8,23.65 C10.1 31.84,22.61 32.54,21.91 34.6,21.91 35.11,21.41 35.11,20.64 32.82,18.36 32.11,18.36 U1.P$E24 | v27.17,20.66 26.69,20.18 26.69,19.53 U1.P$B5
  Bottom 0.3: v29.09,22.21 28.87,22.21 27.32,20.66 v27.17,20.66
N$24  (via drill 0.35)
  Top 0.3: U1.P$D23 31.72,18.92 v32.52,18.92 | C11.1 35.25,23.19 v35.09,23.02
  Bottom 0.3: v32.52,18.92 32.52,19.66 33.5,20.64 34.72,20.64 35.08,21 v35.08,23.02 v35.09,23.02
N$25  (via drill 0.15, 0.35)
  Top 0.3: C17.2 26.59,22.61 X2.1 26.77,22.61 v27.09,22.28
  Bottom 0.3: v27.09,22.28 25.15,20.34 25.15,19.04 25.48,18.71 U1.P$D2
  other vias: 26.01,18.71
N$26  (via drill 0.15, 0.35)
  Top 0.15: X2.2 25.9,25.49
  Top 0.3: C18.2 25.9,25.49 | X2.2 24.1,23.69 v24.1,22.2
  Bottom 0.15: v24.1,22.2 24.03,22.12
  Bottom 0.3: 24.03,22.12 24.03,19.28 25.17,18.14 25.93,18.14 U1.P$F2
  other vias: 26.01,18.21
N$27
  Top 0.3: J1.22 11.34,12.75 12.42,11.67 EPD_C10.2
N$30
  Top 0.3: J1.24 10.62,11.13 12.32,9.43 EPD_C12.2
N$34
  Top 0.3: U1.P$N24 32.07,16.46 32.64,15.9 C9.1
N$37
  Top 0.3: C3.1 38.98,25.96 L1.1 38.16,24.41 38.16,20.97 34.65,17.47 33.06,17.47 32.6,17.93 31.84,17.93 31.62,17.71 U1.P$H23
N$38
  Top 0.3: ANT1.1 41.9,26.39 C22.1 C4.1 | C4.1 | L1.2 39.98,25.8 C4.1
N$39  (via drill 0.35)
  Top 0.3: U1.P$B24 33.32,19.46 34.47,20.62 v34.47,21.21 | v34.36,22.48 33.91,22.93 C1.1 34.08,23.22 X1.1
  Bottom 0.3: v34.47,21.21 34.36,21.32 v34.36,22.48
N$40  (via drill 0.35)
  Top 0.3: X1.3 32.93,27.06 v33.46,27.59 | v33.59,21.24 33.59,20.34 33.23,19.98 C2.1 32.92,19.96 U1.P$A23
  Bottom 0.3: v33.59,21.24 33.51,21.32 33.51,27.54 v33.46,27.59
OUT+
  Top 0.3: TP_OP.TP 10.72,34.46 5.84,34.46 5.28,33.89 IC2.A3
OUT-
  Top 0.3: IC2.C3 8.18,32.82 8.7,32.31 14.36,32.31 TP_ON.TP
P0.13
  Top 0.15: U1.P$AD8 27.51,12.43 28.05,11.89 32.37,11.89 32.6,11.66 SW_UP.2
  Top 0.3: C30.2 31.51,5.05 SW_UP.2 R1.1
P0.14  (via drill 0.15, 0.35)
  Top 0.15: SW_ENT.2 21.6,4.08 21.76,4.24 v21.76,7.61
  Top 0.3: R8.1 21.31,3.51 SW_ENT.2 21.2,4.21 20.73,4.21 C31.2
  Bottom 0.15: v21.76,7.61 22.36,7.61 27.62,12.88 27.62,13.82 U1.P$AC9
  other vias: 27.76,13.96
P1.01  (via drill 0.15, 0.35)
  Top 0.15: R_PWR_EPD.1 17.66,0.72 v17.99,0.72
  Top 0.3: R_PWR_EPD.1 17.05,1.07 Q1.1
  Bottom 0.15: v17.99,0.72 16.64,2.07 16.64,5.44 17.38,6.17 23.19,6.17 28.46,11.45 29.83,11.45 31.99,13.61 32.73,13.61 33.32,14.2 33.32,14.71 32.95,15.07 31.87,15.07 U1.P$Y23
  other vias: 31.51,14.71
P1.02  (via drill 0.35)
  Top 0.15: U1.P$W24 32.02,14.97 v33.69,14.97 v33.7,14.97 | v30.75,10.21 v30.74,10.2 25.2,10.2 23.11,8.12 21.51,8.12 21.09,7.7 21.09,5.6 20.67,5.18 11.54,5.18 10.6,4.24 SW_DN.2
  Top 0.3: C29.2 9.99,4.57 SW_DN.2 9.01,3.96 R7.1
  Bottom 0.15: v30.75,10.21 30.75,10.75 33.7,13.69 v33.7,14.97
PMIC_INT  (via drill 0.15, 0.35)
  Top 0.15: IC1.A1 13.12,23.56 12.82,23.26 12.82,20.53 17.69,15.66 v22.91,15.66
  Bottom 0.15: U1.P$T2 22.96,15.71 v22.91,15.66
  other vias: 26.01,15.71
PREVGH
  Top 0.3: EPD_C9.2 12.31,12.65 11.71,13.25 J1.21 10.2,13.25 9.19,12.24 9.19,9.94 8.67,9.43 D5.1
PREVGL
  Top 0.3: EPD_C11.2 12.37,10.71 11.75,11.33 11.75,11.54 11.04,12.25 J1.23 10.17,12.25 9.82,11.9 9.82,9.9 8.54,8.62 D2.2
RESE  (via drill 0.35)
  Top 0.3: Q3.2 11.63,6.7 12.95,6.7 13.15,6.9 R1_EP_DR.2 12.69,7.19 12.58,7.31 12.58,8.23 v12.6,8.25 | v9.66,22.21 9.7,22.25 J1.3
  Bottom 0.3: v12.6,8.25 11.73,9.11 11.73,10.15 8.45,13.44 8.45,21 v9.66,22.21
RESET  (via drill 0.15, 0.35)
  Top 0.15: v32.73,14.49 33.94,14.49 37.66,18.2 38.93,18.2 39.79,17.34 J2.6 40.83,17.96 40.83,18.72 41.53,19.41 42.79,19.41 45.16,17.05 45.16,10.14 TP_RESET.TP
  Bottom 0.15: v32.73,14.49 32.38,14.49 31.85,13.95 31.83,13.96 U1.P$AC13
  other vias: 28.76,13.96
SCK  (via drill 0.35)
  Top 0.15: U1.P$A12 28.51,20.28 27.65,21.14 22.09,21.14 v20.53,19.57 | J1.13 10.25,17.25 10.02,17.02 v9.66,17.02
  Bottom 0.15: v20.53,19.57 19.6,18.64 16.81,18.64 9.74,18.64 9.19,18.1 9.19,17.48 v9.66,17.02
SCL  (via drill 0.15, 0.35)
  Top 0.15: U3.7 21,22.71 v21.2,22.52 | IC2.C1 6.28,31.81 v7.08,31 v7.09,31 7.09,29.78 TP_SCL.TP | v21.75,14.66 21.84,14.57 21.84,12.73 21.48,12.36 20.43,12.36 20.28,12.21 IC3.12 | v21.2,22.52 21.2,22.48 21.41,22.27 22.23,22.27 22.54,22.58 22.54,23.02 22.12,23.44 R4.1 | R17.2 22.65,22.06 21.4,22.06 21.2,22.27 v21.2,22.52 | IC1.B1 13.34,23.16 13.12,22.94 13.12,20.66 17.77,16 21.91,16 v22.58,16.67
  Bottom 0.15: v22.58,16.67 22.37,16.67 21.75,16.06 v21.75,14.66 | v22.58,16.67 22.29,16.67 21.37,17.59 21.37,22.34 v21.2,22.52 21.2,25.11 15.3,31 v7.09,31 | U1.P$M2 25.97,16.67 v22.58,16.67
  other vias: 26.01,16.71
SDA  (via drill 0.15, 0.35)
  Top 0.15: IC1.C1 13.61,22.76 13.4,22.55 13.4,20.78 17.87,16.31 21.42,16.31 22.1,16.99 v22.1,17.65 22.49,17.27 25.2,17.27 U1.P$L1 23.71,16.96 23.46,16.71 23.46,15.47 23.18,15.19 19.85,15.19 19.63,14.96 19.63,12.75 IC3.2 | U3.8 19.45,23.05 21.43,23.05 21.69,22.78 v22.05,22.78 | R2.1 22.21,24.04 v22.37,23.89 22.49,24.01 R18.2 | TP_SDA.TP 8.51,29.51 v8.27,29.75
  Bottom 0.15: v22.05,22.78 21.67,22.4 21.67,18.08 v22.1,17.65 | v22.05,22.78 21.62,23.21 21.62,25.08 15.36,31.35 7.88,31.35 7.15,32.07 6.02,32.07 IC2.B2 5.54,32.09 5.54,30.73 6.53,29.75 v8.27,29.75 | v22.37,23.89 22.04,23.56 22.04,22.8 v22.05,22.78
  other vias: 5.78,32.32
SWDCLK
  Top 0.15: TP_SWDCLK.TP 41.01,9.02 44.89,12.91 44.89,14.15 43.95,15.09 42.86,15.09 42.5,15.45 41.14,15.45 40.52,16.07 J2.4 39.17,15.03 37.68,15.03 36.7,14.04 32.43,14.04 U1.P$AA24
SWDIO  (via drill 0.35)
  Top 0.15: U1.P$AC24 32.12,13.96 32.55,13.53 36.18,13.53 37.68,12.03 38.93,12.03 39.82,12.92 39.82,14.41 J2.2 | TP_SWDIO.TP 37.29,9.39 v38.17,10.27
  Bottom 0.15: v38.17,10.27 38.79,10.27 39.99,11.47 39.99,14.58 J2.2
  other vias: 40.21,14.8
SWO
  Top 0.15: U1.P$AD22 31.37,13.82 31.71,13.82 32.33,13.19 33.64,13.19 34.07,12.76 34.07,6.95 34.87,6.16 TP_SWO.TP
VBAT
  Top 0.3: U3.2 U3.3 C27.2 16.37,22.21 16.36,22.2 C37.2 | IC1.C2 14.86,22.76 C37.2 | C37.2 16.09,21.26 15.71,20.89 15.71,20.21 TP_VBAT.TP
VBUS
  Top 0.15: J4.A4_B9 25.48,29
  Top 0.3: 25.48,29 25.48,28.44 24.18,27.15 21.37,27.15 20.63,27.89 J4.A9_B4 20.63,28.14 20.12,27.63 12.32,27.63 11.96,27.26 11.96,24.82 12.2,24.58 12.4,24.58 C38.2 | J4.A4_B9 25.65,28.82 25.65,27.72 26.04,27.33 27.1,27.33 29.43,29.66 35.21,29.66 35.7,30.15 35.7,31.36 35.2,31.86 D3.5 33.57,32.04 C43.1 36.15,30.81 C42.1 | U1.P$AD2 26.01,11.78 25.63,11.4 C21.1 25.37,10.91 22.93,8.47 17.44,8.47 16.84,9.07 16.84,16.02 12.42,20.44 12.42,24.57 C38.2 | C38.2 13.99,24.58 14.59,23.97 IC1.A2
VREG  (via drill 0.35)
  Top 0.15: 14.98,23.2 14.63,23.2 IC1.B2
  Top 0.3: IC9.A2 IC9.A3 17.75,26.34 15.99,26.34 C24.2 15.14,27.18 13.62,27.18 v13.39,26.96 | IC9.A2 IC9.A1 17.83,25.39 17.67,25.23 C39.1 15.05,23.26 14.98,23.2 | IC9.A2 17.83,25.86 C23.2 | TP_VREG.TP 3.33,25.79 v3.52,25.6
  Bottom 0.3: v3.52,25.6 4.87,26.96 v13.39,26.96 | v13.39,26.96
(copper drawn outside any net)
  shapes: Bottom area x2, Route15 area x1, Route2 area x1, Top area x1